# Altium PCB pc104-template.PcbDoc
Units mm, origin at the board's own origin, x right, y up, seen from the top; angles counter-clockwise.
Board outline 90.17 x 95.88 mm, 4 copper layers (F.Cu, In1.Cu, In2.Cu, B.Cu); 5 components, 108 nets, 116 pads, 0 vias.
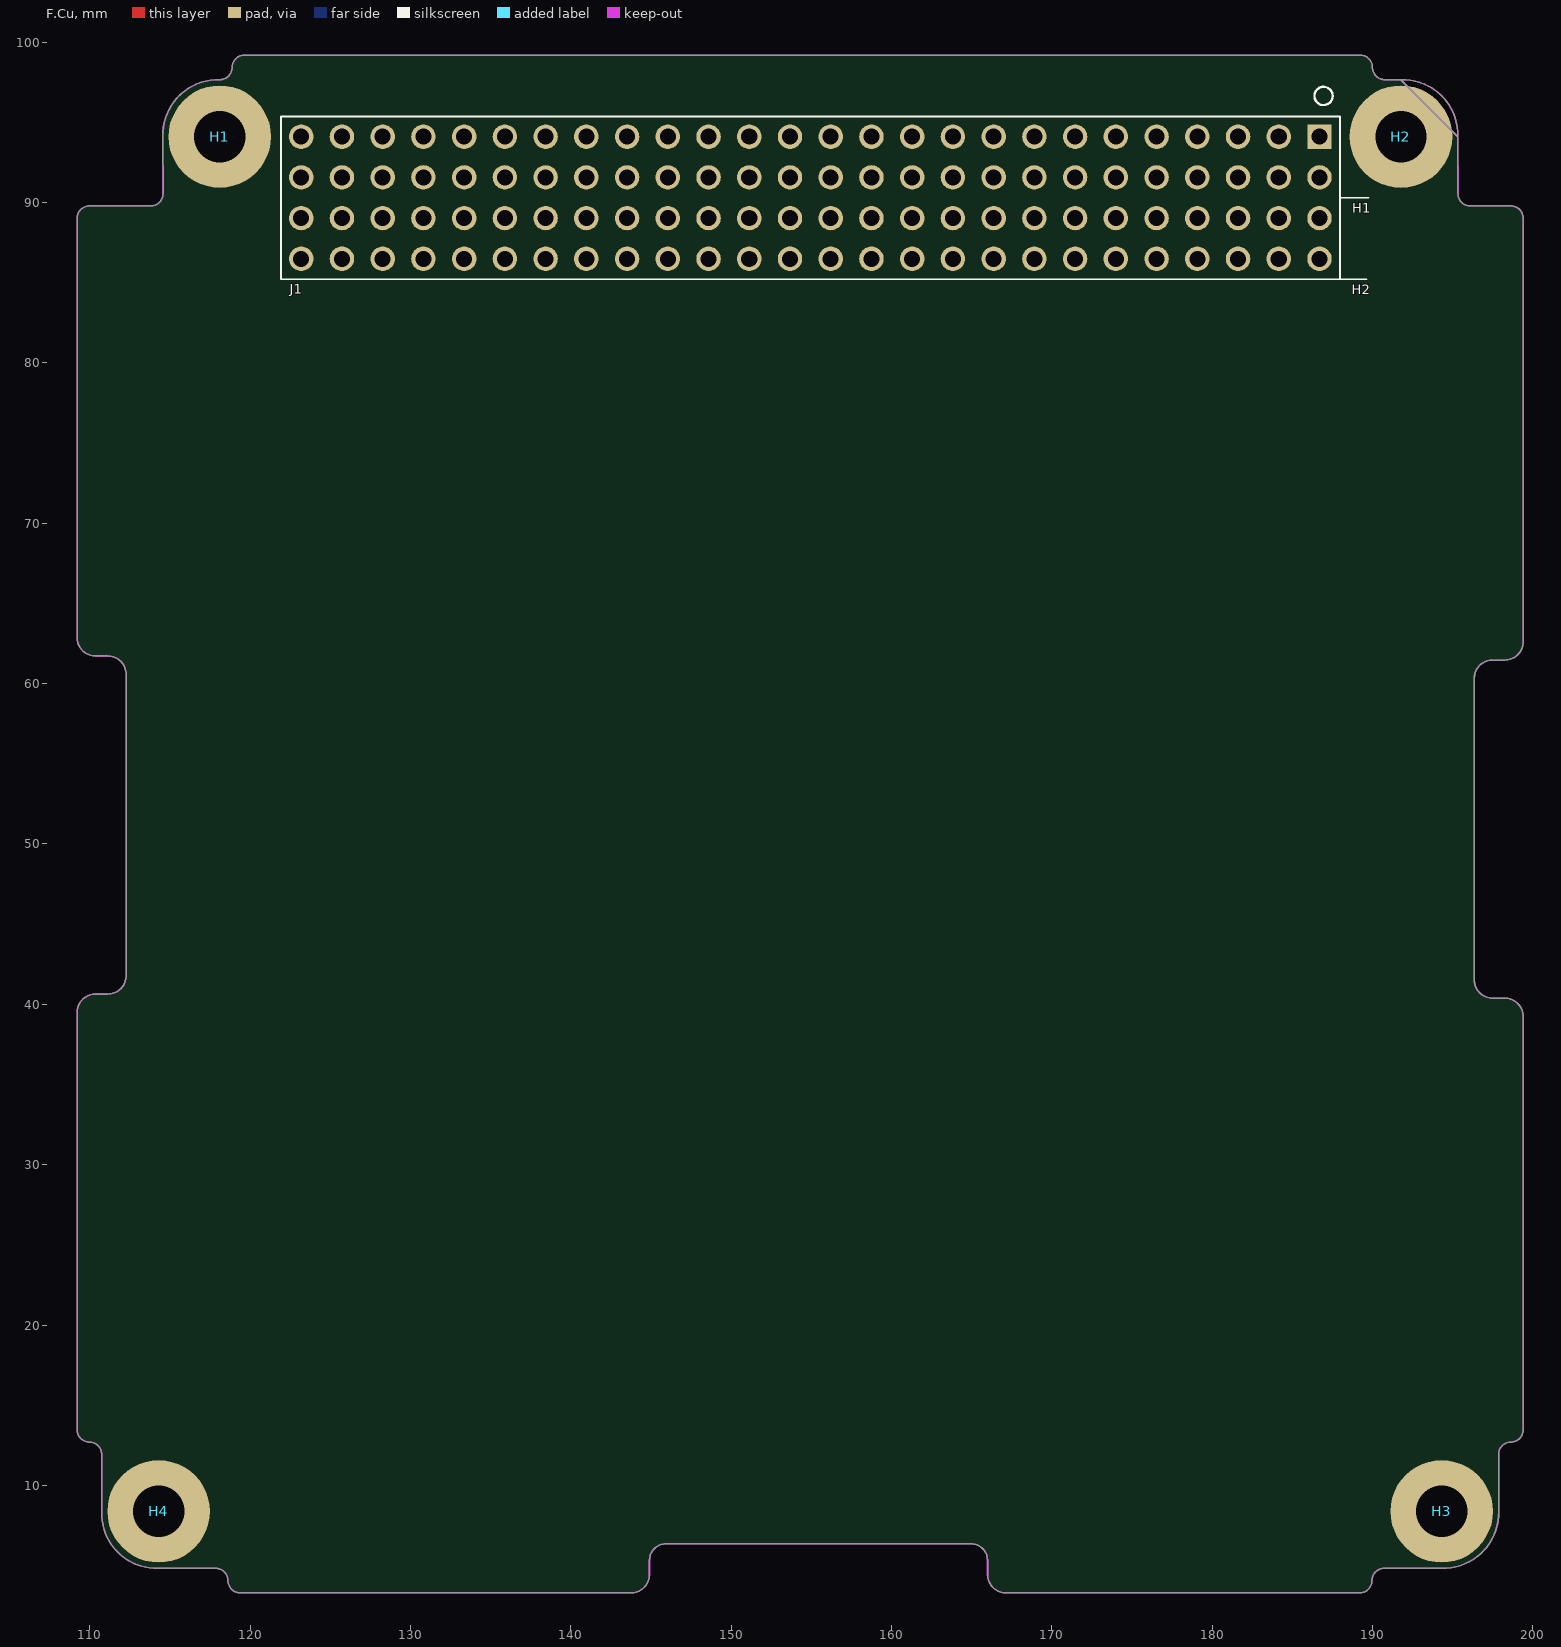
[diagram p0: F.Cu view]
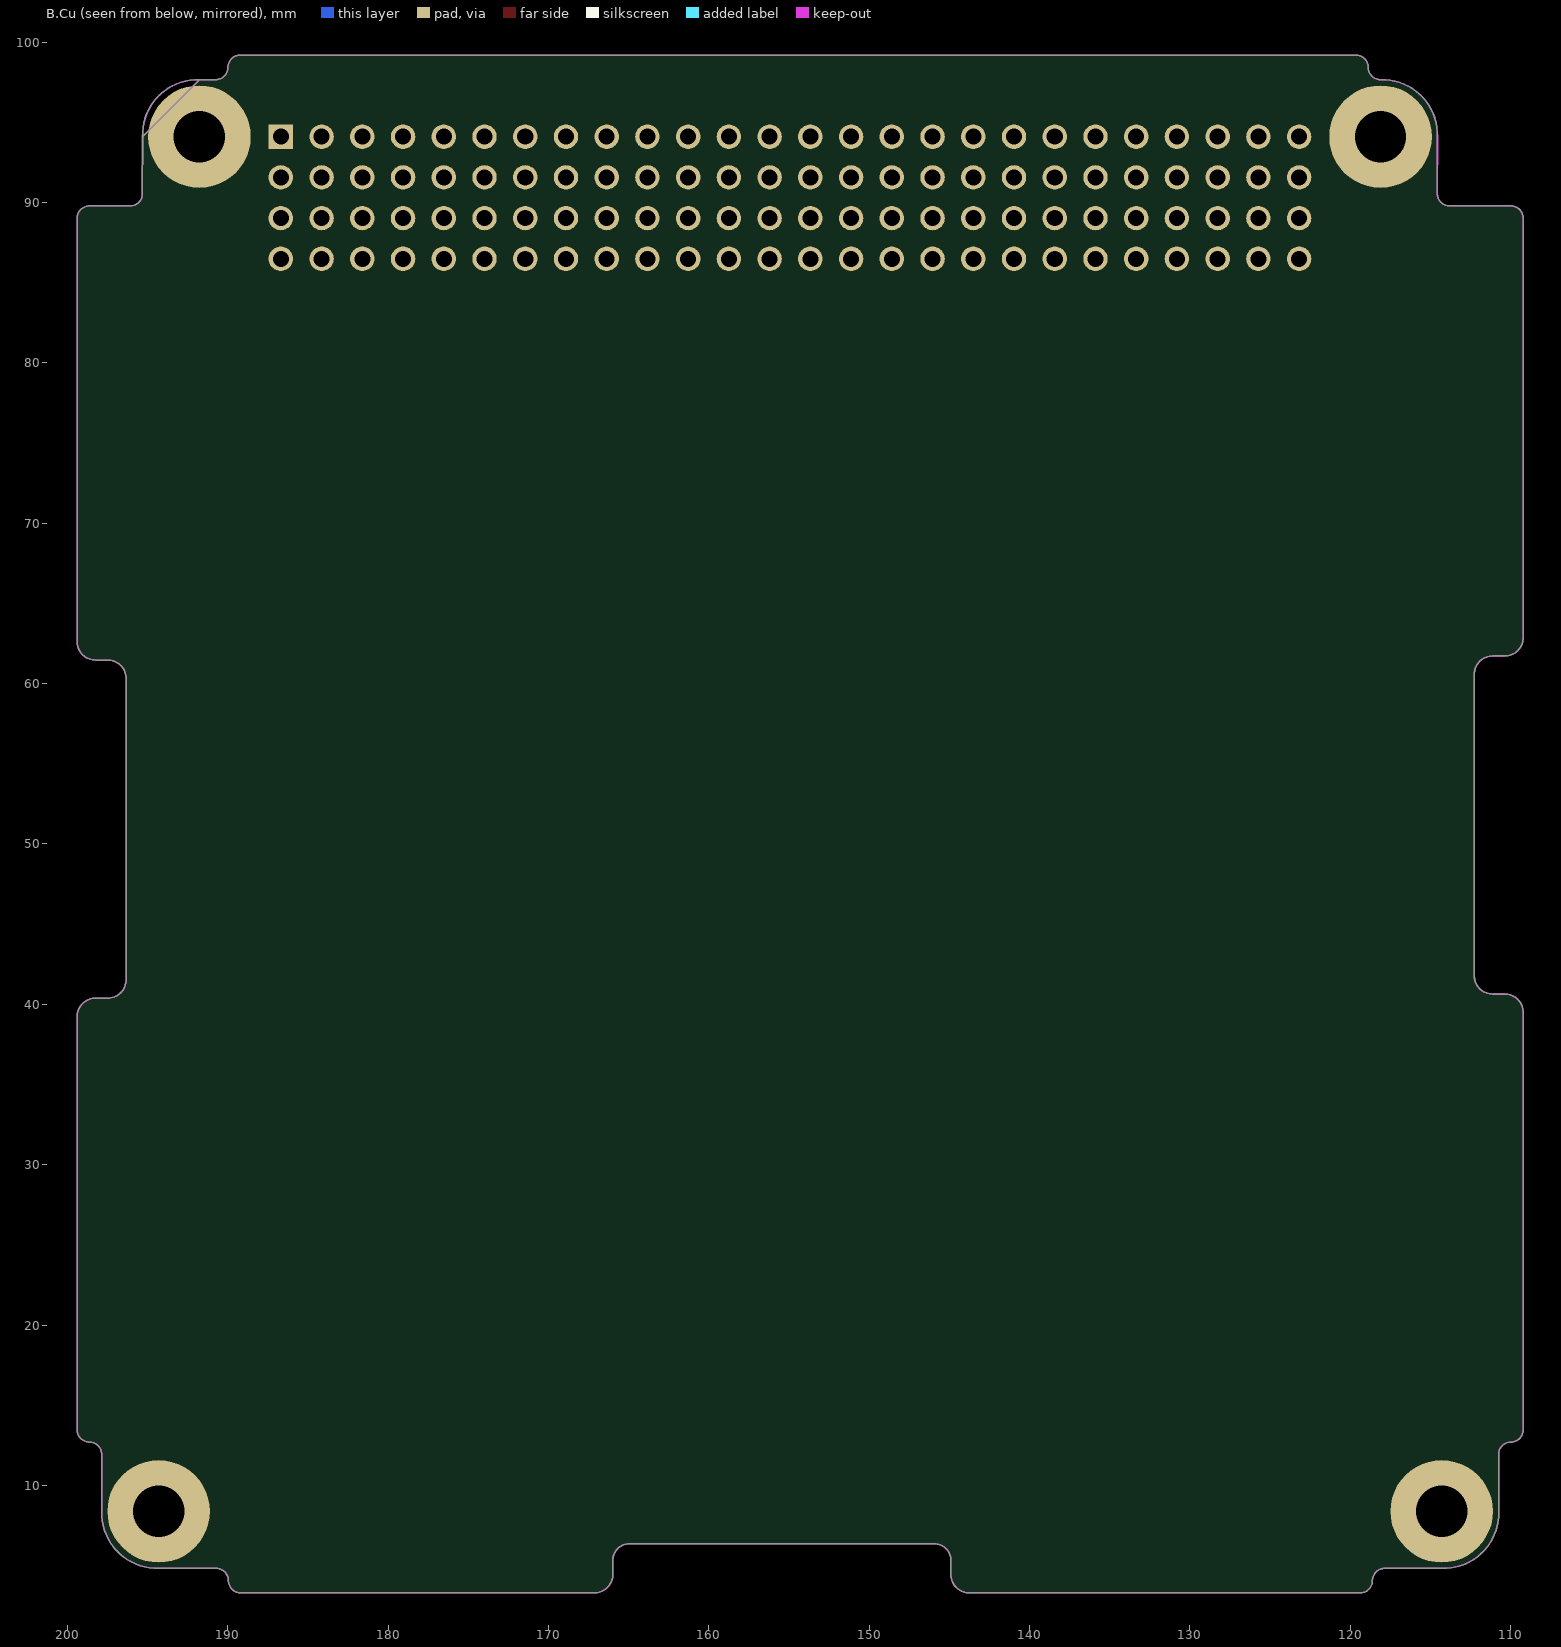
[diagram p1: B.Cu view, seen from below]

## Layer stack, top to bottom
F.Mask: solder mask 0.0102, Solder Resist, Dk 3.5
F.Cu: signal copper 0.0356
Dielectric 1: dielectric 0.32, FR-4, Dk 4.8
In1.Cu: signal copper 0.0356
Dielectric2: dielectric 0.32, FR-4, Dk 4.8
In2.Cu: signal copper 0.0356
Dielectric3: dielectric 0.32, FR-4, Dk 4.8
B.Cu: signal copper 0.0356
B.Mask: solder mask 0.0102, Solder Resist, Dk 3.5

## Board outline
195.317,94.098 ccw(c191.866,94.212) 191.761,97.663 190.754,97.663 cw(c190.754,98.425) 189.992,98.425 ccw(c189.23,98.425) 166.878,99.187 119.643,99.187 ccw(c119.643,98.425) 118.881,98.425 cw(c118.119,98.425) 118.119,97.663 ccw(c118.014,94.212) 114.563,94.098 114.572,90.551 cw(c113.81,90.551) 113.81,89.789 109.982,89.789 ccw(c109.982,89.027) 109.22,62.865 ccw(c110.363,62.865) 110.363,61.722 111.125,61.722 cw(c111.125,60.579) 112.268,41.783 cw(c111.125,41.783) 111.125,40.64 110.363,40.64 ccw(c110.363,39.497) 109.22,39.497 109.22,13.462 ccw(c109.982,13.462) 109.982,12.7 cw(c109.982,11.938) 110.744,8.382 ccw(c114.186,8.268) 114.808,4.826 115.951,4.826 117.856,4.826 cw(c117.856,4.064) 118.618,4.064 ccw(c119.38,4.064) 143.764,3.302 ccw(c143.764,4.445) 144.907,4.445 144.907,5.334 cw(c145.923,5.334) 145.923,6.35 164.973,6.35 cw(c164.973,5.334) 165.989,5.334 165.989,4.445 ccw(c167.132,4.445) 189.199,3.302 ccw(c189.199,4.064) 189.961,4.064 cw(c190.724,4.064) 194.301,4.835 ccw(c194.415,8.277) 197.857,8.391 197.866,11.938 cw(c198.628,11.938) 198.628,12.7 ccw(c198.628,13.462) 199.39,13.462 199.39,39.243 ccw(c198.247,39.243) 198.247,40.386 197.485,40.386 cw(c197.485,41.529) 196.342,41.529 196.342,60.325 cw(c197.485,60.325) 197.485,61.468 198.247,61.468 ccw(c198.247,62.611) 199.39,62.611 199.39,89.027 ccw(c198.628,89.027) 198.628,89.789 196.088,89.789 cw(c196.088,90.551) 195.326,90.551 195.317,94.098 ccw(c191.866,94.212) 195.317,94.098

## Design rules (kind name [scope] priority, off if disabled: settings)
Clearance [All] p1: gap=0.254 ignorepadtopadclearanceinfootprint=FALSE except(0: Arc-Hole Track-Hole SMDPad-Hole THPad-Hole Via-Hole Fill-Hole Poly-Hole Region-Hole Text-Hole)
MinimumSolderMaskSliver [All] p1: minsoldermaskwidth=0
PolygonConnect [All] p1: connectstyle=Direct reliefconductorwidth=0.254 reliefentries=4 polygonreliefangle="90 Angle" airgapwidth=0.254
RoutingVias [All] p1: holewidth=0.711 width=1.27 viastyle="Through Hole" minholewidth=0.711 minwidth=1.27 maxholewidth=0.711 maxwidth=1.27
SilkToSilkClearance [All] p1: silktosilkclearance=0
SilkToSolderMaskClearance [IsPad] p1: minsilkscreentomaskgap=0 clearancetoexposedcopper=TRUE
SolderMaskExpansion [All] p1: expansion=0.102 istentingtop=FALSE
Width [All] p1: maxlimit=0.254 minlimit=0.254 preferedwidth=0.254
27 further rules are at their usual default settings.

## Components (designator, comment, footprint, x,y, rotation, side; value= is the part's Value field where it differs from the comment)
H1 "MountingHole_Pad" MountingHole_3.2mm_M3_Pad_TopBottom 118.11,94.107 r0 top
H2 "MountingHole_Pad" MountingHole_3.2mm_M3_Pad_TopBottom 191.77,94.107 r0 top
H3 "MountingHole_Pad" MountingHole_3.2mm_M3_Pad_TopBottom 194.31,8.382 r0 top
H4 "MountingHole_Pad" MountingHole_3.2mm_M3_Pad_TopBottom 114.3,8.382 r0 top
J1 "PC104_Connector" pc104-connector 156.21,91.567 r270 top

## Footprints (in the part's own frame and the unit in brackets; to place one, negate y for a bottom-side part, rotate by r counter-clockwise, add the part's x,y. Pads: shape width x height; smd on the part's side, far side on the other; paste and mask are expansions set on the pad)
MountingHole_3.2mm_M3_Pad_TopBottom [mm]
  round 6.4 smd far side paste-6.4 mask+0: 1(0,0)
  round 6.4 smd paste-6.4 mask+0: 1(0,0)
  round 3.6 hole 3.2 paste-2539.97 mask+0: 1(0,0)
pc104-connector [mil]
  rect 60x60 hole 39.37 paste-99999 mask+0: 1(-100,1200)
  round 60 hole 39.37 paste-99999 mask+0: 2(0,1200) 3(-100,1100) 4(0,1100) 5(-100,1000) 6(0,1000) 7(-100,900) 8(0,900) 9(-100,800) 10(0,800) 11(-100,700) 12(0,700) 13(-100,600) 14(0,600) 15(-100,500) 16(0,500) 17(-100,400) 18(0,400) 19(-100,300) 20(0,300) 21(-100,200) 22(0,200) 23(-100,100) 24(0,100) 25(-100,0) 26(0,0) 27(-100,-100) 28(0,-100) 29(-100,-200) 30(0,-200) 31(-100,-300) 32(0,-300) 33(-100,-400) 34(0,-400) 35(-100,-500) 36(0,-500) 37(-100,-600) 38(0,-600) 39(-100,-700) 40(0,-700) 41(-100,-800) 42(0,-800) 43(-100,-900) 44(0,-900) 45(-100,-1000) 46(0,-1000) 47(-100,-1100) 48(0,-1100) 49(-100,-1200) 50(0,-1200) 51(-100,-1300) 52(0,-1300) 53(100,1200) 54(200,1200) 55(100,1100) 56(200,1100) 57(100,1000) 58(200,1000) 59(100,900) 60(200,900) 61(100,800) 62(200,800) 63(100,700) 64(200,700) 65(100,600) 66(200,600) 67(100,500) 68(200,500) 69(100,400) 70(200,400) 71(100,300) 72(200,300) 73(100,200) 74(200,200) 75(100,100) 76(200,100) 77(100,0) 78(200,0) 79(100,-100) 80(200,-100) 81(100,-200) 82(200,-200) 83(100,-300) 84(200,-300) 85(100,-400) 86(200,-400) 87(100,-500) 88(200,-500) 89(100,-600) 90(200,-600) 91(100,-700) 92(200,-700) 93(100,-800) 94(200,-800) 95(100,-900) 96(200,-900) 97(100,-1000) 98(200,-1000) 99(100,-1100) 100(200,-1100) 101(100,-1200) 102(200,-1200) 103(100,-1300) 104(200,-1300)
  silkscreen extent -150,-1350 250,1320

## Part data
H1 H2 H3 H4: library part MountingHole_3.2mm_M3_Pad_TopBottom, "Mounting Hole 3.2mm, M3", Sheetfile=pc104-template.kicad_sch
J1: library part pc104-connector, Sheetfile=pc104-template.kicad_sch

## Nets (pads, with @x,y where several pads share a name; then routed paths per layer and width w, separated by ;. In a path a pad name is that pad's centre, name@x,y a point inside that pad or via, vN(x,y) a via of type N, cw(c..) or ccw(c..) an arc to the next point about the centre after c; other vN are vias at no path point)
unconnected-(H1-Pad1): H1.1
unconnected-(H2-Pad1): H2.1
unconnected-(H3-Pad1): H3.1
unconnected-(H4-Pad1): H4.1
unconnected-(J1-Pad1): J1.1
unconnected-(J1-Pad2): J1.2
unconnected-(J1-Pad3): J1.3
unconnected-(J1-Pad4): J1.4
unconnected-(J1-Pad5): J1.5
unconnected-(J1-Pad6): J1.6
unconnected-(J1-Pad7): J1.7
unconnected-(J1-Pad8): J1.8
unconnected-(J1-Pad9): J1.9
unconnected-(J1-Pad10): J1.10
unconnected-(J1-Pad11): J1.11
unconnected-(J1-Pad12): J1.12
unconnected-(J1-Pad13): J1.13
unconnected-(J1-Pad14): J1.14
unconnected-(J1-Pad15): J1.15
unconnected-(J1-Pad16): J1.16
unconnected-(J1-Pad17): J1.17
unconnected-(J1-Pad18): J1.18
unconnected-(J1-Pad19): J1.19
unconnected-(J1-Pad20): J1.20
unconnected-(J1-Pad21): J1.21
unconnected-(J1-Pad22): J1.22
unconnected-(J1-Pad23): J1.23
unconnected-(J1-Pad24): J1.24
unconnected-(J1-Pad25): J1.25
unconnected-(J1-Pad26): J1.26
unconnected-(J1-Pad27): J1.27
unconnected-(J1-Pad28): J1.28
unconnected-(J1-Pad29): J1.29
unconnected-(J1-Pad30): J1.30
unconnected-(J1-Pad31): J1.31
unconnected-(J1-Pad32): J1.32
unconnected-(J1-Pad33): J1.33
unconnected-(J1-Pad34): J1.34
unconnected-(J1-Pad35): J1.35
unconnected-(J1-Pad36): J1.36
unconnected-(J1-Pad37): J1.37
unconnected-(J1-Pad38): J1.38
unconnected-(J1-Pad39): J1.39
unconnected-(J1-Pad40): J1.40
unconnected-(J1-Pad41): J1.41
unconnected-(J1-Pad42): J1.42
unconnected-(J1-Pad43): J1.43
unconnected-(J1-Pad44): J1.44
unconnected-(J1-Pad45): J1.45
unconnected-(J1-Pad46): J1.46
unconnected-(J1-Pad47): J1.47
unconnected-(J1-Pad48): J1.48
unconnected-(J1-Pad49): J1.49
unconnected-(J1-Pad50): J1.50
unconnected-(J1-Pad51): J1.51
unconnected-(J1-Pad52): J1.52
unconnected-(J1-Pad53): J1.53
unconnected-(J1-Pad54): J1.54
unconnected-(J1-Pad55): J1.55
unconnected-(J1-Pad56): J1.56
unconnected-(J1-Pad57): J1.57
unconnected-(J1-Pad58): J1.58
unconnected-(J1-Pad59): J1.59
unconnected-(J1-Pad60): J1.60
unconnected-(J1-Pad61): J1.61
unconnected-(J1-Pad62): J1.62
unconnected-(J1-Pad63): J1.63
unconnected-(J1-Pad64): J1.64
unconnected-(J1-Pad65): J1.65
unconnected-(J1-Pad66): J1.66
unconnected-(J1-Pad67): J1.67
unconnected-(J1-Pad68): J1.68
unconnected-(J1-Pad69): J1.69
unconnected-(J1-Pad70): J1.70
unconnected-(J1-Pad71): J1.71
unconnected-(J1-Pad72): J1.72
unconnected-(J1-Pad73): J1.73
unconnected-(J1-Pad74): J1.74
unconnected-(J1-Pad75): J1.75
unconnected-(J1-Pad76): J1.76
unconnected-(J1-Pad77): J1.77
unconnected-(J1-Pad78): J1.78
unconnected-(J1-Pad79): J1.79
unconnected-(J1-Pad80): J1.80
unconnected-(J1-Pad81): J1.81
unconnected-(J1-Pad82): J1.82
unconnected-(J1-Pad83): J1.83
unconnected-(J1-Pad84): J1.84
unconnected-(J1-Pad85): J1.85
unconnected-(J1-Pad86): J1.86
unconnected-(J1-Pad87): J1.87
unconnected-(J1-Pad88): J1.88
unconnected-(J1-Pad89): J1.89
unconnected-(J1-Pad90): J1.90
unconnected-(J1-Pad91): J1.91
unconnected-(J1-Pad92): J1.92
unconnected-(J1-Pad93): J1.93
unconnected-(J1-Pad94): J1.94
unconnected-(J1-Pad95): J1.95
unconnected-(J1-Pad96): J1.96
unconnected-(J1-Pad97): J1.97
unconnected-(J1-Pad98): J1.98
unconnected-(J1-Pad99): J1.99
unconnected-(J1-Pad100): J1.100
unconnected-(J1-Pad101): J1.101
unconnected-(J1-Pad102): J1.102
unconnected-(J1-Pad103): J1.103
unconnected-(J1-Pad104): J1.104

## Keep-outs
Edge.Cuts:
  lines w0.1: 109.22,13.462 ccw(c109.982,13.462) 109.982,12.7 ; 109.22,13.462 ccw(c109.982,13.462) 109.982,12.7 ; 109.22,13.462 109.22,39.497 ; 109.22,13.462 109.22,39.497 ; 109.22,39.497 cw(c110.363,39.497) 110.363,40.64 ; 109.22,39.497 cw(c110.363,39.497) 110.363,40.64 ; 109.22,62.865 ccw(c110.363,62.865) 110.363,61.722 ; 109.22,62.865 ccw(c110.363,62.865) 110.363,61.722 ; 109.22,62.865 109.22,89.027 ; 109.22,62.865 109.22,89.027 ; 109.22,89.027 cw(c109.982,89.027) 109.982,89.789 ; 109.22,89.027 cw(c109.982,89.027) 109.982,89.789 ; 109.982,12.7 cw(c109.982,11.938) 110.744,11.938 ; 109.982,12.7 cw(c109.982,11.938) 110.744,11.938 ; 109.982,89.789 113.81,89.789 ; 109.982,89.789 113.81,89.789 ; 110.363,40.64 111.125,40.64 ; 110.363,40.64 111.125,40.64 ; 110.363,61.722 111.125,61.722 ; 110.363,61.722 111.125,61.722 ; 110.744,8.382 ccw(c114.186,8.268) 114.3,4.826 ; 110.744,8.382 ccw(c114.186,8.268) 114.3,4.826 ; 110.744,8.382 110.744,11.938 ; 110.744,8.382 110.744,11.938 ; 111.125,40.64 ccw(c111.125,41.783) 112.268,41.783 ; 111.125,40.64 ccw(c111.125,41.783) 112.268,41.783 ; 111.125,61.722 cw(c111.125,60.579) 112.268,60.579 ; 111.125,61.722 cw(c111.125,60.579) 112.268,60.579 ; 112.268,41.783 112.268,60.579 ; 112.268,41.783 112.268,60.579 ; 113.81,89.789 ccw(c113.81,90.551) 114.572,90.551 ; 113.81,89.789 ccw(c113.81,90.551) 114.572,90.551 ; 114.3,4.826 114.808,4.826 ; 114.3,4.826 114.808,4.826 ; 114.563,94.098 cw(c118.014,94.212) 118.119,97.663 ; 114.563,94.098 cw(c118.014,94.212) 118.119,97.663 ; 114.563,94.098 114.572,90.551 ; 114.563,94.098 114.572,90.551 ; 114.808,4.826 115.951,4.826 ; 114.808,4.826 115.951,4.826 ; 115.951,4.826 117.856,4.826 ; 115.951,4.826 117.856,4.826 ; 117.856,4.826 cw(c117.856,4.064) 118.618,4.064 ; 117.856,4.826 cw(c117.856,4.064) 118.618,4.064 ; 118.119,97.663 ccw(c118.119,98.425) 118.881,98.425 ; 118.119,97.663 ccw(c118.119,98.425) 118.881,98.425 ; 118.618,4.064 ccw(c119.38,4.064) 119.38,3.302 ; 118.618,4.064 ccw(c119.38,4.064) 119.38,3.302 ; 118.881,98.425 cw(c119.643,98.425) 119.643,99.187 ; 118.881,98.425 cw(c119.643,98.425) 119.643,99.187 ; 119.38,3.302 143.764,3.302 ; 119.38,3.302 143.764,3.302 ; 119.643,99.187 166.878,99.187 ; 119.643,99.187 166.878,99.187 ; 143.764,3.302 ccw(c143.764,4.445) 144.907,4.445 ; 143.764,3.302 ccw(c143.764,4.445) 144.907,4.445 ; 144.907,4.445 144.907,5.334 ; 144.907,4.445 144.907,5.334 ; 144.907,5.334 cw(c145.923,5.334) 145.923,6.35 ; 144.907,5.334 cw(c145.923,5.334) 145.923,6.35 ; 145.923,6.35 164.973,6.35 ; 145.923,6.35 164.973,6.35 ; 164.973,6.35 cw(c164.973,5.334) 165.989,5.334 ; 164.973,6.35 cw(c164.973,5.334) 165.989,5.334 ; 165.989,4.445 ccw(c167.132,4.445) 167.132,3.302 ; 165.989,4.445 ccw(c167.132,4.445) 167.132,3.302 ; 165.989,4.445 165.989,5.334 ; 165.989,4.445 165.989,5.334 ; 166.878,99.187 189.23,99.187 ; 166.878,99.187 189.23,99.187 ; 167.132,3.302 189.199,3.302 ; 167.132,3.302 189.199,3.302 ; 189.199,3.302 ccw(c189.199,4.064) 189.961,4.064 ; 189.199,3.302 ccw(c189.199,4.064) 189.961,4.064 ; 189.23,99.187 cw(c189.23,98.425) 189.992,98.425 ; 189.23,99.187 cw(c189.23,98.425) 189.992,98.425 ; 189.961,4.064 cw(c190.724,4.064) 190.754,4.826 ; 189.961,4.064 cw(c190.724,4.064) 190.754,4.826 ; 189.992,98.425 ccw(c190.754,98.425) 190.754,97.663 ; 189.992,98.425 ccw(c190.754,98.425) 190.754,97.663 ; 190.754,4.826 194.301,4.835 ; 190.754,4.826 194.301,4.835 ; 190.754,97.663 191.761,97.663 ; 190.754,97.663 191.761,97.663 ; 191.761,97.663 cw(c191.866,94.212) 195.317,94.098 ; 191.761,97.663 cw(c191.866,94.212) 195.317,94.098 ; 191.761,97.663 cw(c191.866,94.212) 195.317,94.098 ; 191.761,97.663 cw(c191.866,94.212) 195.317,94.098 ; 191.761,97.663 195.317,94.098 ; 194.301,4.835 ccw(c194.415,8.277) 197.857,8.391 ; 194.301,4.835 ccw(c194.415,8.277) 197.857,8.391 ; 195.317,94.098 195.326,90.551 ; 195.317,94.098 195.326,90.551 ; 195.326,90.551 ccw(c196.088,90.551) 196.088,89.789 ; 195.326,90.551 ccw(c196.088,90.551) 196.088,89.789 ; 196.088,89.789 198.628,89.789 ; 196.088,89.789 198.628,89.789 ; 196.342,41.529 ccw(c197.485,41.529) 197.485,40.386 ; 196.342,41.529 ccw(c197.485,41.529) 197.485,40.386 ; 196.342,41.529 196.342,60.325 ; 196.342,41.529 196.342,60.325 ; 196.342,60.325 cw(c197.485,60.325) 197.485,61.468 ; 196.342,60.325 cw(c197.485,60.325) 197.485,61.468 ; 197.485,40.386 198.247,40.386 ; 197.485,40.386 198.247,40.386 ; 197.485,61.468 198.247,61.468 ; 197.485,61.468 198.247,61.468 ; 197.857,8.391 197.866,11.938 ; 197.857,8.391 197.866,11.938 ; 197.866,11.938 cw(c198.628,11.938) 198.628,12.7 ; 197.866,11.938 cw(c198.628,11.938) 198.628,12.7 ; 198.247,40.386 cw(c198.247,39.243) 199.39,39.243 ; 198.247,40.386 cw(c198.247,39.243) 199.39,39.243 ; 198.247,61.468 ccw(c198.247,62.611) 199.39,62.611 ; 198.247,61.468 ccw(c198.247,62.611) 199.39,62.611 ; 198.628,12.7 ccw(c198.628,13.462) 199.39,13.462 ; 198.628,12.7 ccw(c198.628,13.462) 199.39,13.462 ; 198.628,89.789 cw(c198.628,89.027) 199.39,89.027 ; 198.628,89.789 cw(c198.628,89.027) 199.39,89.027 ; 199.39,13.462 199.39,39.243 ; 199.39,13.462 199.39,39.243 ; 199.39,62.611 199.39,89.027 ; 199.39,62.611 199.39,89.027

## Silkscreen, mask and mechanical layers (free items; w line width, h text height)
F.SilkS:
  circle w0.15: c186.944,96.647 r0.568

## Dimensions
114.808,8.382 to 114.808,3.302 on User.1
114.3,8.89 to 109.22,8.89 on User.1
143.764,4.318 to 167.132,4.318 on User.1
118.618,99.187 to 118.618,94.107 on User.1
109.22,99.187 to 199.39,99.187 on User.1
193.802,3.302 to 193.802,8.382 on User.1
198.882,62.611 to 198.882,39.243 on User.1
199.39,8.89 to 194.31,8.89 on User.1
109.22,93.599 to 118.11,93.599 on User.1
109.22,99.187 to 109.22,3.302 on User.1
110.49,62.865 to 110.49,39.497 on User.1
109.22,99.187 to 191.77,99.187 on User.1

## Text inside footprints (layer, text, board x,y; h text height)
J1: F.SilkS "H1" at 188.734,89.131 h1; F.SilkS "H2" at 188.698,84.048 h1